# Altium PCB 6C-2L-1550um.PcbDoc
Units mm, origin at the board's own origin, x right, y up, seen from the top; angles counter-clockwise.
Board outline 37.5 x 32.5 mm, 2 copper layers (Top Layer, Bottom Layer), stack 1.586 mm thick; 26 components, 25 nets, 114 pads, 0 vias.
Unrouted connection lines stored in the file: 79.
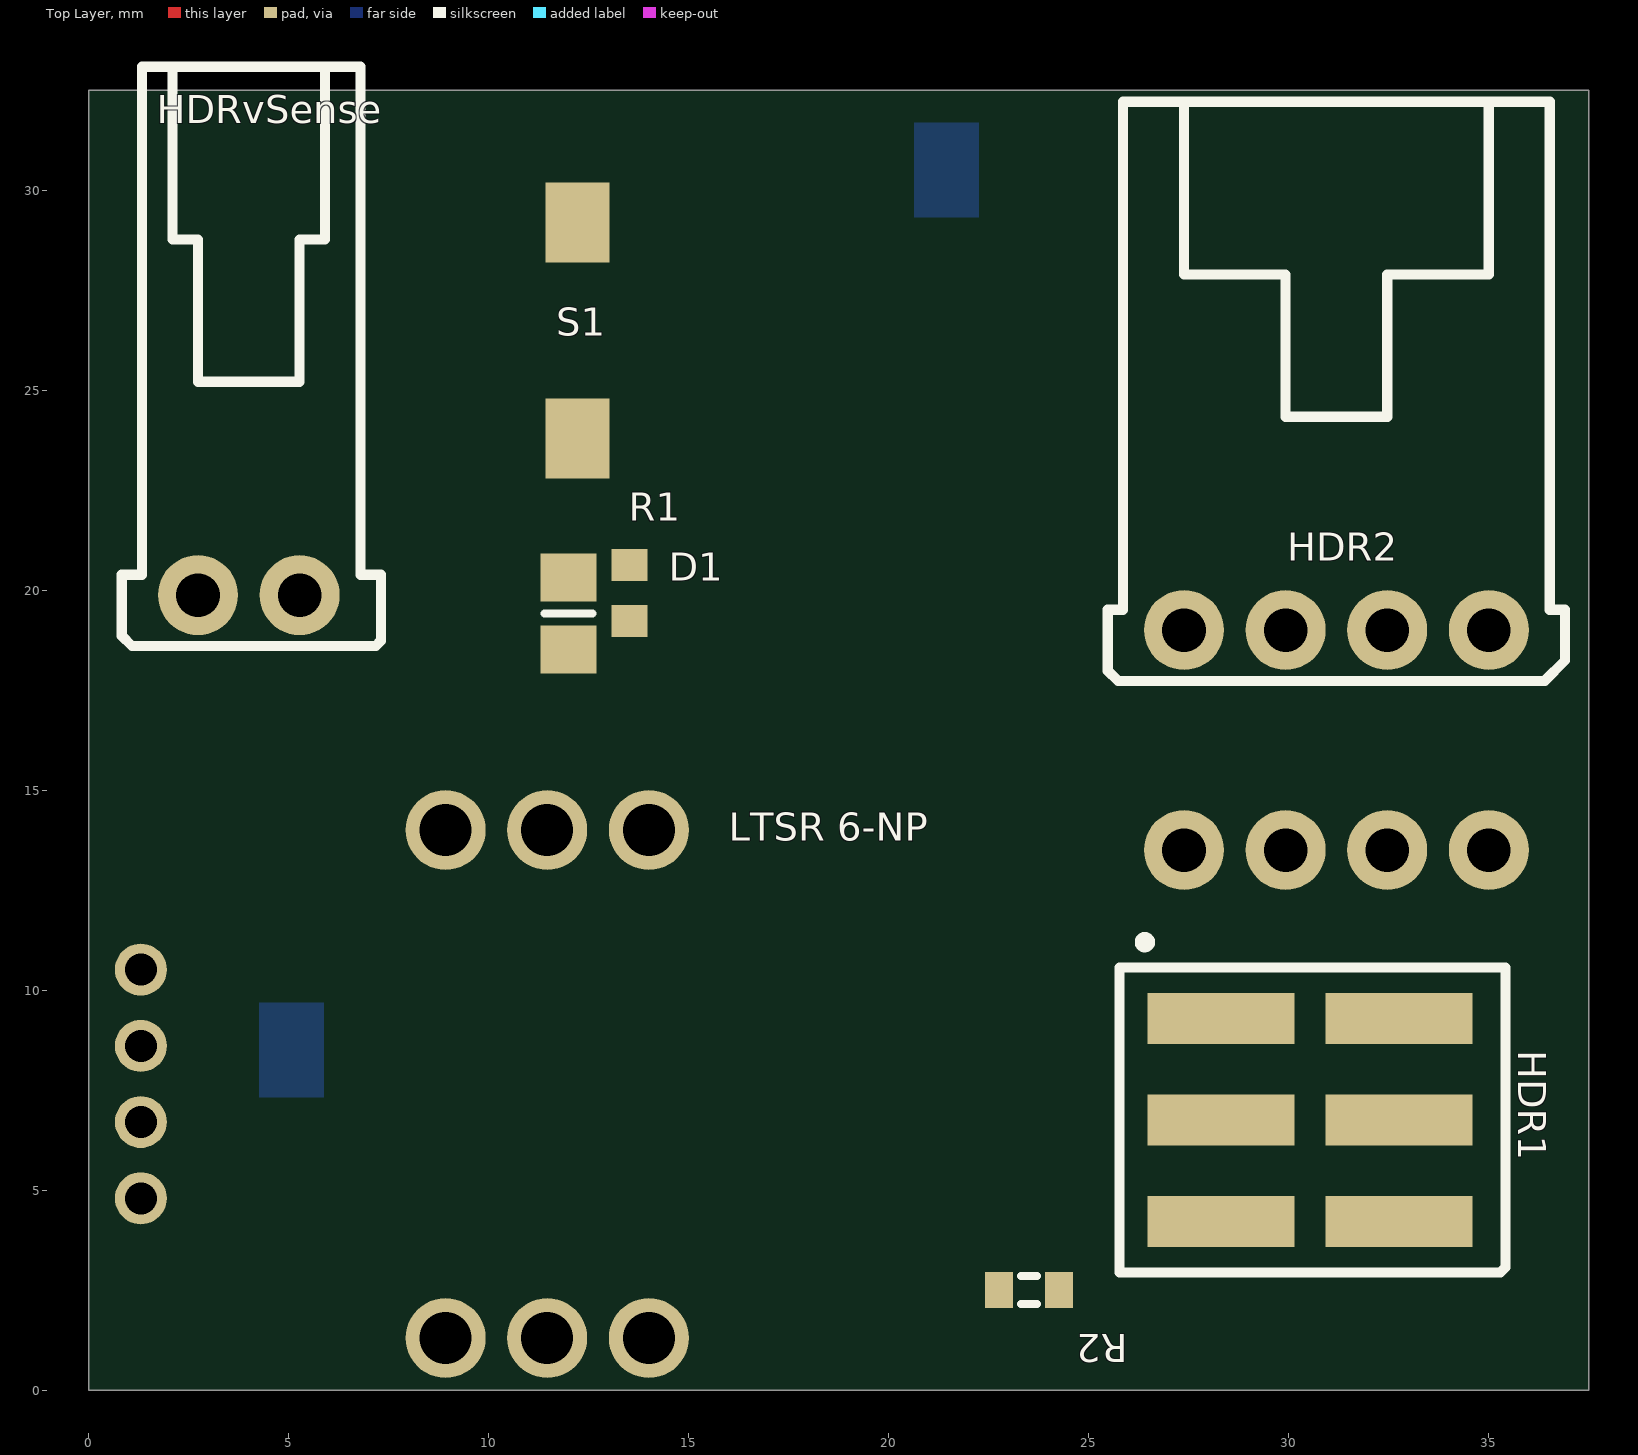
[diagram p0: Top Layer view]
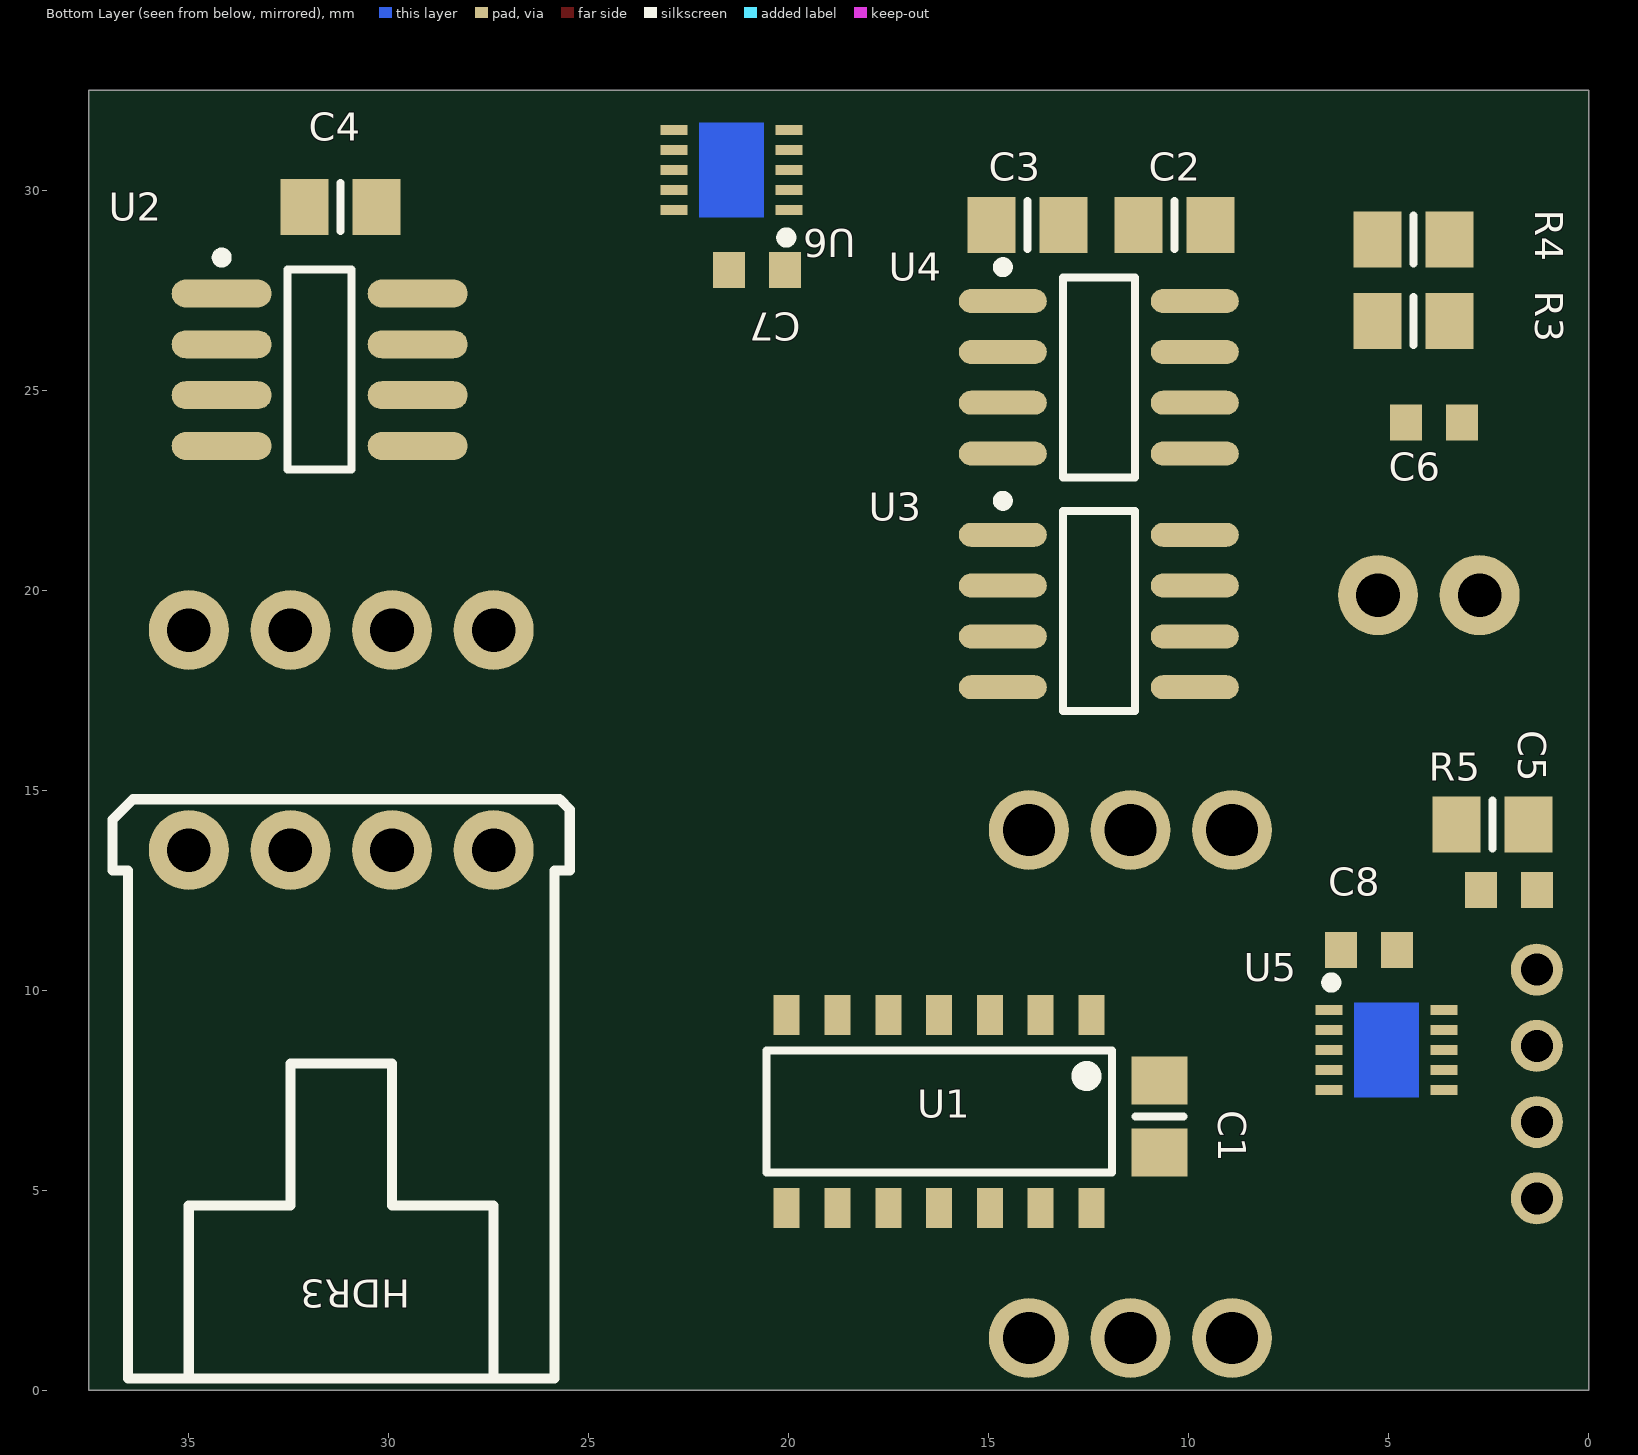
[diagram p1: Bottom Layer view, seen from below]

## Layer stack, top to bottom
Top Solder: solder mask 0.0102, Solder Resist, Dk 3.5
Top Layer: signal copper 0.018
Dielectric1: core 1.55, FR-4, Dk 4.8
Bottom Layer: signal copper 0.018
Bottom Solder: solder mask 0.0102, Solder Resist, Dk 3.5

## Board outline
0,0 37.5,0 37.5,32.5 0,32.5

## Design rules (kind name [scope] priority, off if disabled: settings)
Clearance Clearance-xPP-xTP-xTT [All] p1: gap=0.15
ComponentClearance [All] p1: gap=0.25 collisioncheckmode=3 verticalgap=0.25 showdistances=FALSE
DiffPairsRouting [All] p1: maxlimit=0.25 minlimit=0.25 mostfreqgap=0.25 toplayer_minwidth=0.381 toplayer_maxwidth=0.381 toplayer_prefwidth=0.381 bottomlayer_minwidth=0.381 bottomlayer_maxwidth=0.381 bottomlayer_prefwidth=0.381 maxuncoupledlength=12.5
Height [All] p1: minheight=0 maxheight=25 prefheight=12.5
HoleSize HoleSize-PTH [All] p1: absolutevalues=TRUE maxlimit=2 minlimit=0.25 maxpercent=80.000 minpercent=20.000
HoleToHoleClearance [All] p1: gap=0.15 allowstackedmicrovias=TRUE
MinimumAnnularRing "Minimum IAR  >0.45mm" [((ObjectKind = 'Pad') OR (ObjectKind = 'Via')) And (Layer = 'MultiLayer') And (HoleDiameter > AsMM(0.45))] p1: minimumring=0.25 // minimum inner annular ring for pads > 0.45mm finished hole size
MinimumAnnularRing "Minimum IAR <=0.45mm" [((ObjectKind = 'Pad') OR (ObjectKind = 'Via')) And (Layer = 'MultiLayer') And (HoleDiameter <= AsMM(0.45))] p2: minimumring=0.225 // minimum inner annular ring for pads <= 0.45mm finished hole size
MinimumSolderMaskSliver [All] p1: minsoldermaskwidth=0.1
PlaneClearance PlaneClearance-IPI [All] p1: clearance=0.4
PlaneConnect [All] p1: planeconnectstyle=Relief reliefexpansion=0.4 reliefentries=4 reliefconductorwidth=0.2 reliefairgap=0.2
PolygonConnect PolygonConnect-xTW [All] p1: connectstyle=Relief reliefconductorwidth=0.2 reliefentries=4 polygonreliefangle="90 Angle" airgapwidth=0.254
RoutingCorners [All] p1: cornerstyle=45-Degree minsetback=2.5 maxsetback=2.5
RoutingVias "RoutingVias > 0.45mm" [(ObjectKind = 'Via') And (HoleDiameter > AsMM(0.45))] p1: holewidth=0.5 width=1 viastyle="Through Hole" minholewidth=0.45 minwidth=0.95 maxholewidth=0.9 maxwidth=1.4 // finishet hole size > 0.45mm
RoutingVias "RoutingVias <= 0.45mm" [(ObjectKind = 'Via') And (HoleDiameter <= AsMM(0.45))] p2: holewidth=0.3 width=0.8 viastyle="Through Hole" minholewidth=0.25 minwidth=0.7 maxholewidth=0.5 maxwidth=1 // finishet hole size <= 0.45mm
SMDNeckDown [All] p1: percent=100.000
SilkToSilkClearance [All] p1: silktosilkclearance=0.2
SilkToSolderMaskClearance SilkscreenOverComponentPads [IsPad] p1: minsilkscreentomaskgap=0.2 clearancetoexposedcopper=TRUE
SolderMaskExpansion [All] p1: expansion=0.1
Width Width-xTW [All] p1: maxlimit=1.5 minlimit=0.15 preferedwidth=0.2
19 further rules are at their usual default settings.

## Classes and differential pairs
component class U_general_Interface: C1 C2 C3 C4 D1 R1 R2 S1 U1 U2 U3
component class U_sensor_specific: C5 C6 C7 C8 HDR1 HDR2 HDR3 HDRvSense "LTSR 6-NP" R3 R4 R5 U4 U5 U6

## Components (designator, comment, footprint, x,y, rotation, side; value= is the part's Value field where it differs from the comment)
C1 "Cap2" 6-0805_N 10.73,6.835 r270 bottom
C2 "Cap2" 6-0805_N 10.356,29.128 r0 bottom
C3 "Cap2" 6-0805_N 14.028,29.128 r180 bottom
C4 "Cap2" 6-0805_N 31.212,29.572 r0 bottom
C5 "Cap Semi" 1608[0603] 2,12.5 r180 bottom
C6 "Cap Semi" 1608[0603] 3.871,24.192 r0 bottom
C7 "Cap Semi" 1608[0603] 20.8,28 r180 bottom
C8 "Cap Semi" 1608[0603] 5.5,11 r180 bottom
D1 "LED0" 1608[0603] 13.521,19.925 r90 top
HDR1 "Programming header" MOLEX_HEADER_6_SMD 28.307,9.292 r270 top
HDR2 "RS-485 interface" MOLEX_HEADER_4H_SHRD 27.38,19 r0 top
HDR3 "RS-485 interface" MOLEX_HEADER_4H_SHRD 27.38,13.5 r0 bottom
HDRvSense "MOLEX_HEADER_2H_SHRD" MOLEX_HEADER_2H_SHRD 4,20 r0 top
"LTSR 6-NP" "LTSR 6-NP" "LTSR 6-NP" 11.46,14 r180 top
R1 "Res1" 6-0805_N 11.997,19.417 r270 top
R2 "Res1" J1-0603 23.5,2.5 r180 top
R3 "Res1" 6-0805_N 4.379,26.732 r180 bottom
R4 "Res1" 6-0805_N 4.379,28.764 r180 bottom
R5 "Res1" 6-0805_N 2.404,14.134 r180 bottom
S1 "SW-PB" ADTSM3 13.118,22.694 r90 top
U1 "ATtiny441" 6ST1_L 16.242,6.962 r270 bottom
U2 "SP485" 8S1_M 31.728,25.508 r180 bottom
U3 "L78L05ACD" 8S1_N 12.25,25.318 r180 bottom
U4 "LT1634" 8S1_N 12.25,19.476 r180 bottom
U5 "LTC2482" DFN33 6.5,8.5 r270 bottom
U6 "LTC2482" DFN33 20,30.5 r90 bottom

## Footprints (in the part's own frame and the unit in brackets; to place one, negate y for a bottom-side part, rotate by r counter-clockwise, add the part's x,y. Pads: shape width x height; smd on the part's side, far side on the other; paste and mask are expansions set on the pad)
6-0805_N [mm] "Chip Resistor, Body 2.0x1.2mm, IPC Medium Density"
  rect 1.2x1.4 smd: 1(-0.9,0) 2(0.9,0)
  silkscreen extent 0,-0.6 0,0.6, body extent -1.07,-0.7 1.07,0.7, height 0.7
6ST1_L [mm] "SOT23, 6-Leads, Body 2.9x1.6mm, Pitch 0.95mm, Lead Span 2.7mm, IPC High Density"
  rect 1x0.65 smd: 1(-2.413,3.81) 2(-2.413,2.54) 3(-2.413,1.27) 4(-2.413,0) 5(-2.413,-1.27) 6(-2.413,-2.54) 7(-2.413,-3.81) 8(2.413,-3.81) 9(2.413,-2.54) 10(2.413,-1.27) 11(2.413,0) 12(2.413,1.27) 13(2.413,2.54) 14(2.413,3.81)
  silkscreen extent -1.52,-4.32 1.52,4.32, body extent -1.91,-4.32 1.91,4.32, height 1.45
8S1_M [mm] "SOIC, 8-Leads, Body 4.9x3.9mm, Pitch 1.27mm, IPC Low Density"
  oval 2.5x0.7 smd: 1(-2.45,1.905) 2(-2.45,0.635) 3(-2.45,-0.635) 4(-2.45,-1.905) 5(2.45,-1.905) 6(2.45,-0.635) 7(2.45,0.635) 8(2.45,1.905)
  silkscreen extent -2.58,-2.5 0.8,2.93, body extent -2,-2.5 2,2.5, height 1.75
8S1_N [mm] "SOIC, 8-Leads, Body 4.9x3.9mm, Pitch 1.27mm, IPC Medium Density"
  oval 2.2x0.6 smd: 1(-2.4,1.905) 2(-2.4,0.635) 3(-2.4,-0.635) 4(-2.4,-1.905) 5(2.4,-1.905) 6(2.4,-0.635) 7(2.4,0.635) 8(2.4,1.905)
  silkscreen extent -2.53,-2.5 0.9,2.88, body extent -2,-2.5 2,2.5, height 1.75
1608[0603] [mm] "Chip Capacitor, Body 1.6x0.8mm, IPC High Density"
  rect 0.8x0.9 smd: 1(-0.7,0) 2(0.7,0)
  body extent -0.87,-0.48 0.87,0.48, height 1.3
ADTSM3 [mm]
  rect 2x1.6 smd: 1(1.1,0.9) 2(6.5,0.9)
  body extent 1,-1.3 6.6,3.1, height 4
DFN33 [mm] "DD Package  10-Lead Plastic DFN (3mm × 3mm)"
  rect 0.25x0.675 smd paste+0 mask+0: 1(-1,0) 10(-1,2.875)
  rect 0.25x0.675 smd mask+0: 2(-0.5,0) 3(0,0) 4(0.5,0) 5(1,0) 6(1,2.875) 7(0.5,2.875) 8(0,2.875) 9(-0.5,2.875)
  Top Layer region: -1.188,2.25 1.187,2.25 1.187,0.625 -1.188,0.625
  silkscreen extent -1.81,-0.06 -1.56,0.19, body extent -1.52,-0.13 1.52,2.92, height 0.75
J1-0603 [mm] "Chip Resistor, Body 1.6x0.8mm, IPC High Density"
  rect 0.7x0.9 smd: 1(-0.75,0) 2(0.75,0)
  silkscreen extent -0.2,-0.35 0.2,0.35, body extent -0.85,-0.48 0.85,0.48, height 0.9
"LTSR 6-NP" [mm]
  round 2 hole 1.3 unplated: 1(2.54,0) 2(0,0) 3(-2.54,0) 4(-2.54,12.7) 5(0,12.7) 6(2.54,12.7)
  round 1.3 hole 0.8 unplated: +5V(10.16,3.49) GND(10.16,5.395) OUT(10.16,7.3) ref(10.16,9.205)
  body extent -10.21,-0.38 11.99,13.12, height 2.8
MOLEX_HEADER_2H_SHRD [mm]
  round 2 hole 1.09 unplated: 1(-1.27,-0.127) 2(1.27,-0.127)
  silkscreen extent -3.18,-1.4 3.3,13.08, body extent -3.68,-0.83 3.68,12.76, height 7.06
MOLEX_HEADER_4H_SHRD [mm]
  round 2 hole 1.09: 1(0,0) 2(2.54,0) 3(5.08,0) 4(7.62,0)
  silkscreen extent -1.91,-1.27 9.52,13.21, body extent -2.54,-0.7 10.16,12.89, height 7.06
MOLEX_HEADER_6_SMD [mm] "Part Number: 15-91-0060"
  rect 1.27x3.68 smd: 1(0,0) 2(0,4.445) 3(2.54,0) 4(2.54,4.445) 5(5.08,0) 6(5.08,4.445)
  silkscreen extent -2.03,-2.54 6.35,7.11, body extent -1.14,-1.33 6.48,5.65, height 9.64

## Part data
C1 C2 C3 C4: "Capacitor"
C5 C6 C7 C8: "Capacitor (Semiconductor SIM Model)"
D1: "Typical INFRARED GaAs LED"
HDR1: library part PRGM_HDR
HDR2 HDR3: library part MABSS_RS485, "Part Number: 70553-0003. MABSS connector"
HDRvSense: "Part Number: 70553-0001. 2-wire signal inputs"
R1 R2 R3 R4 R5: "Resistor"
S1: "Switch"
U3: "Positive Voltage Regulator"

## Nets (pads, with @x,y where several pads share a name; then routed paths per layer and width w, separated by ;. In a path a pad name is that pad's centre, name@x,y a point inside that pad or via, vN(x,y) a via of type N, cw(c..) or ccw(c..) an arc to the next point about the centre after c; other vN are vias at no path point)
+5V: "LTSR 6-NP.+5V" C1.1 C3.1 C4.1 C5.2 C7.1 C8.1 R2.2 R5.2 U1.1 U2.8 U3.1 U5.2 U6.2
GND: "LTSR 6-NP.GND" C1.2 C2.2 C3.2 C4.2 C5.1 C7.2 C8.2 HDR1.6 HDR2.4 HDR3.4 R1.2 S1.2 U1.14 U2.5 U3.2 U3.3 U3.6 U3.7 U4.4 U5.1 U5.6 U5.8 U6.1 U6.6 U6.8
NetC6_1: C6.1 HDRvSense.2 R4.2 U6.5
NetC6_2: C6.2 R3.1 R4.1 U6.4
NetD1_1: D1.1 U1.2
NetD1_2: D1.2 R1.1
NetHDR1_1: HDR1.1 U1.8
NetHDR1_3: HDR1.3 U1.9 U5.9 U6.9
NetHDR1_4: HDR1.4 U1.7 U5.7 U6.7
NetHDR1_5: HDR1.5 R2.1 U1.4
NetHDR2_2: HDR2.2 HDR3.2 U2.6
NetHDR2_3: HDR2.3 HDR3.3 U2.7
NetHDRvSense_1: HDRvSense.1 R3.2
"NetLTSR 6-NP_1": "LTSR 6-NP.1" "LTSR 6-NP.2" "LTSR 6-NP.3"
"NetLTSR 6-NP_4": "LTSR 6-NP.4" "LTSR 6-NP.5" "LTSR 6-NP.6"
"NetLTSR 6-NP_OUT": "LTSR 6-NP.OUT" U5.4
"NetLTSR 6-NP_ref": "LTSR 6-NP.ref" U5.5
NetR5_1: R5.1 U1.13 U4.6 U5.3 U6.3
NetS1_1: S1.1 U1.3
NetU1_5: U1.5
NetU1_6: U1.6
NetU1_10: U1.10 U2.2 U2.3
NetU1_11: U1.11 U2.1
NetU1_12: U1.12 U2.4
VCC: C2.1 HDR1.2 HDR2.1 HDR3.1 U3.8
pads on no net: U3.4 U3.5 U4.1 U4.2 U4.3 U4.5 U4.7 U4.8 U5.10 U6.10

## Silkscreen, mask and mechanical layers (free items; w line width, h text height)
Mechanical 1:
  text ".Pcb_File_Name_No_Path" at -1,-3 h1.2